# EAGLE board File (EAGLE 9.7.0)

Size 119.41 x 108.35 mm. Coordinates in mm from the lower left corner, seen from the top.
Outline: 0,0 119.41,0 119.41,108.35 0,108.35 0,0
Copper layers (1*16): Top 0.035mm / dielectric 1.5mm / Bottom 0.035mm
Design rules "default": minimum track width 6mil, minimum drill 0.35mm, track to track 6mil, track to pad 6mil, pad to pad 6mil, via to via 6mil, smd to smd 6mil, copper to edge 40mil, drill to drill 6mil, minimum pad ring 10mil, minimum via ring 8mil, stop-mask expansion 4mil, vias tented up to drill 0mil, thermal gap 10mil

## Footprints (pad centres in the part's own frame; a part is rotated, then mirrored left to right if it is on the bottom)
DIODE-AXIAL = drill 1: 1 -5.08,0; 2 5.08,0
SWITCH-MOMENTARY-PTH-6.5MM = drill 1.016 pad 1.88: 1 -3.251,2.261; 2 3.251,2.261; 3 -3.251,-2.261; 4 3.251,-2.261
SG90 = drill 1.016 long: 1 -2.54,0; 2 0,0; 3 2.54,0
ARDUINO-UNO-R3-SHIELD = drill 1.016 pad 1.88: 3.3V 24.13,-2.54; 5V 24.13,0; A0 24.13,12.7; A1 24.13,15.24; A2 24.13,17.78; A3 24.13,20.32; A4 24.13,22.86; A5 24.13,25.4; AREF -24.13,-13.97; D2 -24.13,20.32; D3 -24.13,17.78; D4 -24.13,15.24; D5 -24.13,12.7; D6 -24.13,10.16; D7 -24.13,7.62; D8 -24.13,3.81; D9 -24.13,1.27; D10 -24.13,-1.27; D11 -24.13,-3.81; D12 -24.13,-6.35; D13 -24.13,-8.89; GND@0 24.13,2.54; GND@1 24.13,5.08; GND@2 -24.13,-11.43; IOREF 24.13,-7.62; NC 24.13,-10.16; RES 24.13,-5.08; RX -24.13,25.4; SCL -24.13,-19.05; SDA -24.13,-16.51; TX -24.13,22.86; VIN 24.13,7.62

## Placement (x,y rotation side)
D1  DIODEDIODE-AXIAL  [DIODE-AXIAL]  18.68,84.45 90 top
D2  DIODEDIODE-AXIAL  [DIODE-AXIAL]  21.21,84.45 90 top
D3  DIODEDIODE-AXIAL  [DIODE-AXIAL]  23.75,84.45 90 top
D4  DIODEDIODE-AXIAL  [DIODE-AXIAL]  26.3,84.45 90 top
S1  SWITCH_MOMENTARY  [SWITCH-MOMENTARY-PTH-6.5MM]  36.45,85.72 90 top
S2  SWITCH_MOMENTARY  [SWITCH-MOMENTARY-PTH-6.5MM]  51.7,85.72 90 top
S3  SWITCH_MOMENTARY  [SWITCH-MOMENTARY-PTH-6.5MM]  64.39,85.72 90 top
S4  SWITCH_MOMENTARY  [SWITCH-MOMENTARY-PTH-6.5MM]  77.09,85.72 90 top
SERVO1  SERVOSG90  [SG90]  112.43,102.08 0 top
U2  ARDUINO-UNO-R3-SHIELD  [ARDUINO-UNO-R3-SHIELD]  47.88,29.84 270 top

## Library data of the parts
D1-D4 S1-S4 SERVO1 U2 = Tinkercad

## Nets
U2_5V: SERVO1.2 U2.5V
U2_D2: D1.1 D2.1 D3.1 D4.1 U2.D2
U2_D3: SERVO1.3 U2.D3
U2_D4: D1.2 S4.1 S4.2 U2.D4
U2_D5: D2.2 S3.1 S3.2 U2.D5
U2_D6: D3.2 S2.1 S2.2 U2.D6
U2_D7: D4.2 S1.1 S1.2 U2.D7
U2_GND: S1.3 S1.4 S2.3 S2.4 S3.3 S3.4 S4.3 S4.4 SERVO1.1 U2.GND@0 U2.GND@1 U2.GND@2

## Tracks (layer width: path | path; a pad name or v marks a point on that pad's centre or on a via)
U2_5V  (1 unrouted)
U2_D2  (4 unrouted)
U2_D3  (1 unrouted)
U2_D4  (3 unrouted)
U2_D5  (3 unrouted)
U2_D6  (3 unrouted)
U2_D7  (3 unrouted)
U2_GND  (11 unrouted)